# Altium PCB DSO.PcbDoc
Units mm, origin at the board's own origin, x right, y up, seen from the top; angles counter-clockwise.
Board outline 110 x 100 mm, 2 copper layers (Top Layer, Bottom Layer), stack 1.571 mm thick; 103 components, 108 nets, 477 pads, 0 vias.
Unrouted connection lines stored in the file: 262.
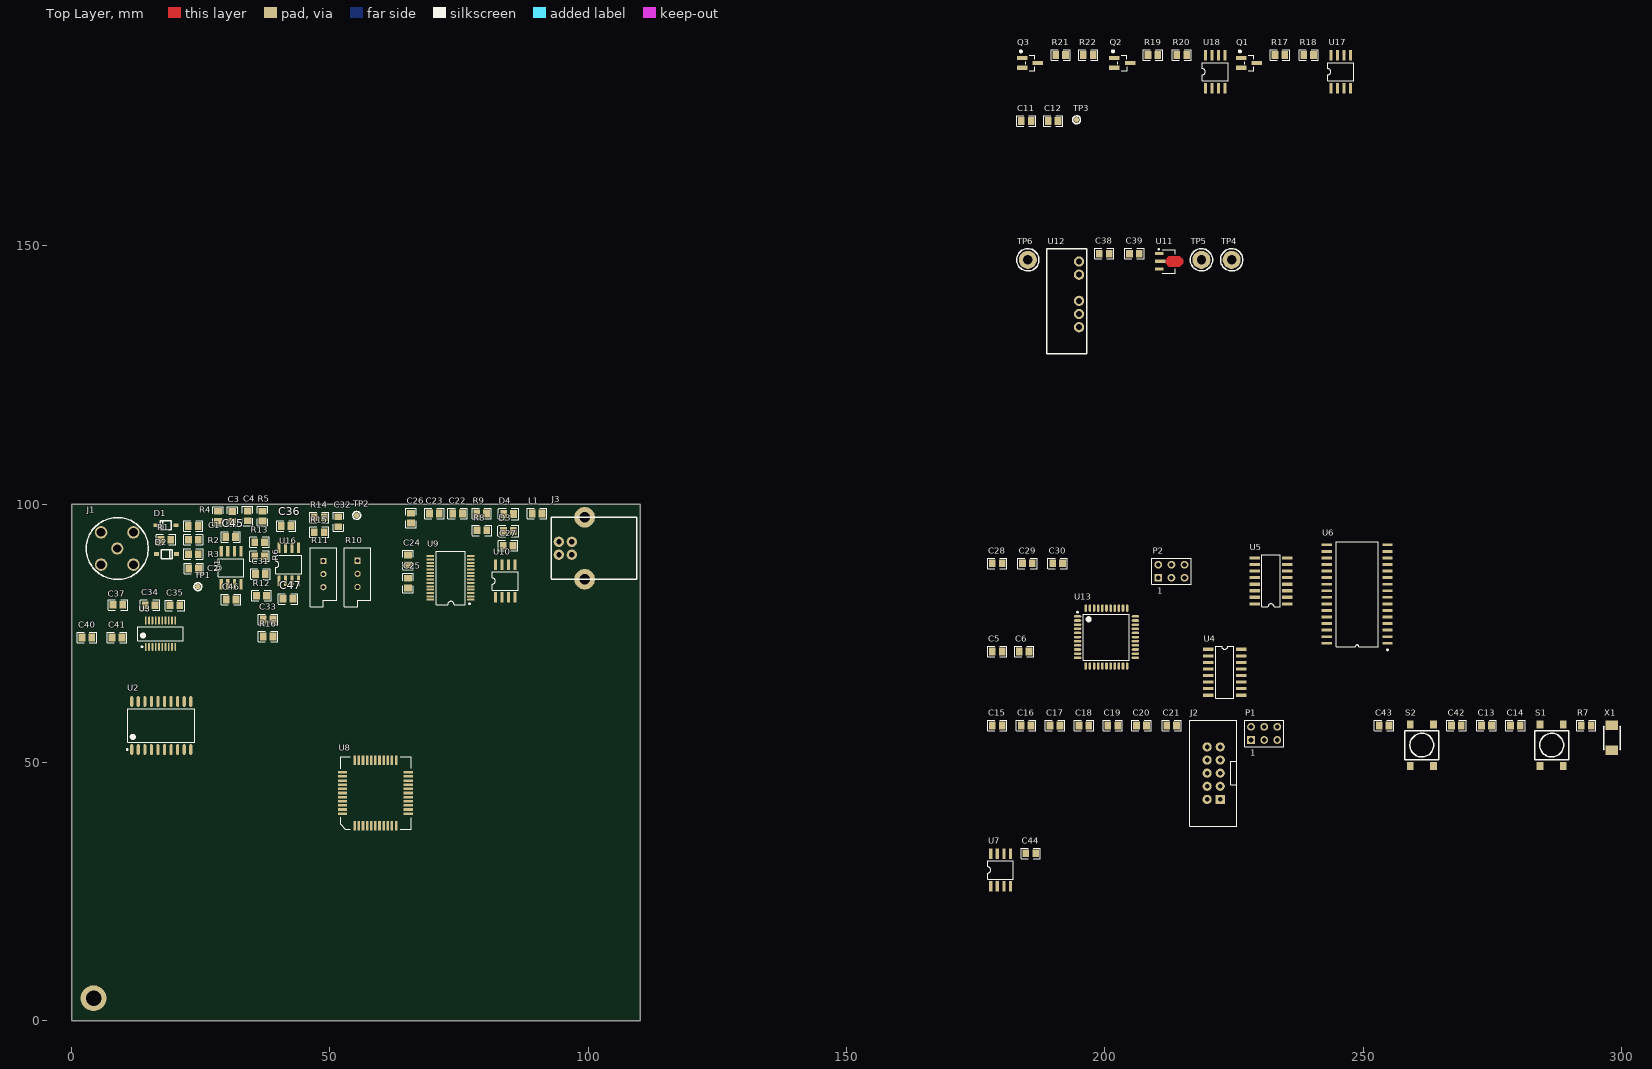
[diagram p0: Top Layer view]
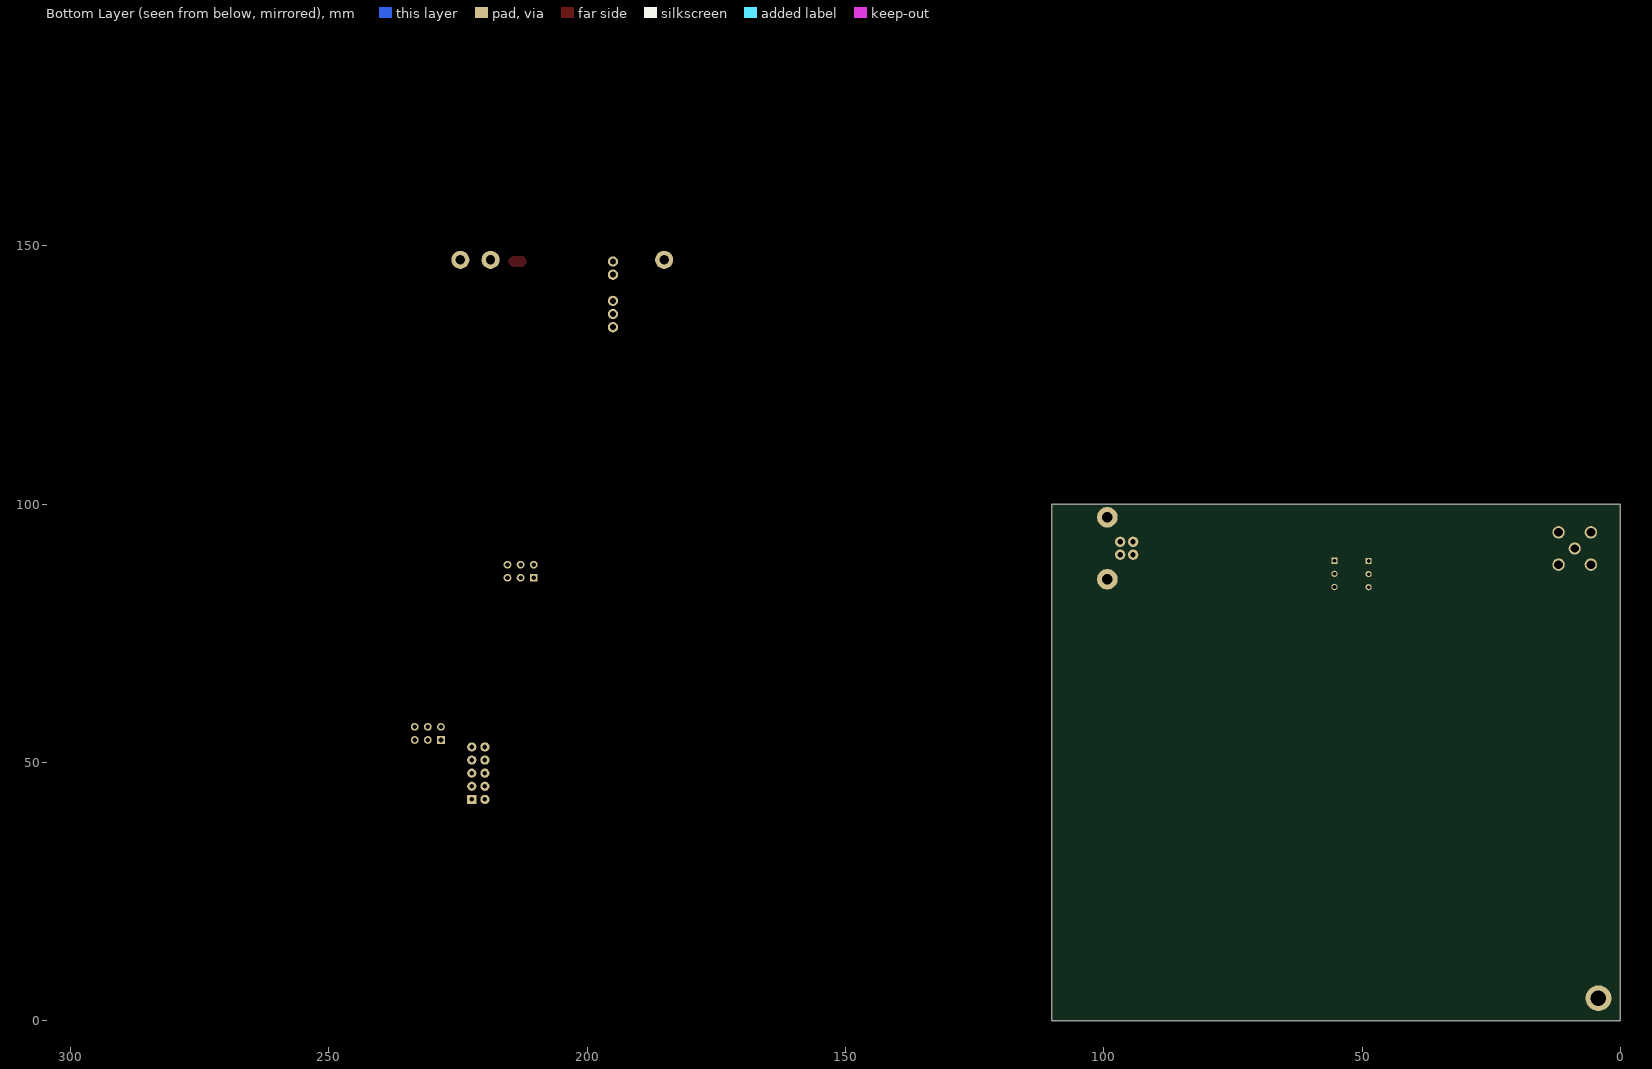
[diagram p1: Bottom Layer view, seen from below]

## Layer stack, top to bottom
Top Solder: solder mask 0.0102, Solder Resist, Dk 3.5
Top Layer: signal copper 0.0356
Dielectric1: core 1.5, FR-4, Dk 4.8
Bottom Layer: signal copper 0.0356
Bottom Solder: solder mask 0.0102, Solder Resist, Dk 3.5

## Board outline
0.072,0.021 0.072,100.021 110.072,100.021 110.072,0.021

## Design rules (kind name [scope] priority, off if disabled: settings)
Clearance [All] p1: gap=0.254
ComponentClearance [All] p1 off: gap=0.254 collisioncheckmode=3 verticalgap=0.254 showdistances=FALSE
DiffPairsRouting [All] p1: maxlimit=0.508 minlimit=0.254 mostfreqgap=0.254 toplayer_minwidth=0.381 toplayer_maxwidth=0.381 toplayer_prefwidth=0.381 bottomlayer_minwidth=0.381 bottomlayer_maxwidth=0.381 bottomlayer_prefwidth=0.381 maxuncoupledlength=12.7
FabricationTestPointUsage TestPointUsage [All] p1: valid=0 allowmultiple=FALSE
FabricationTestpoint Testpoint [All] p1: side=3 testpointundercomponent=TRUE minsize=1.016 maxsize=2.54 preferedsize=1.524 minholesize=0 maxholesize=1.016 preferedholesize=0.813 testpointgrid=0.025 allowsidetop=TRUE allowsidebottom=TRUE usegrid=TRUE gridtolerance=0
Height [All] p1: minheight=0 maxheight=200 prefheight=12.7
HoleSize [All] p1: absolutevalues=TRUE maxlimit=5.055 minlimit=0.381 maxpercent=80.000 minpercent=20.000
MinimumAnnularRing [All] p1: minimumring=0.127
PolygonConnect PolygonConnect_2 [(ObjectKind = 'Via') vs IsNamedPolygon('Bottom Layer-No Net') Or  IsNamedPolygon('Top Power') Or  IsNamedPolygon('TOP MCU VCC') Or  IsNamedPolygon('Top Analog') Or  IsNamedPolygon('Top USB') Or  IsNamedPolygon('Top Digital') Or  IsNamedPolygon('Top RAM VCC') Or  IsNamedPolygon('Bottom Power') Or  IsNamedPolygon('Bottom Analog') Or  IsNamedPolygon('Bottom Digital')] p1: connectstyle=Direct reliefconductorwidth=0.254 reliefentries=4 polygonreliefangle="90 Angle" airgapwidth=0.254
PolygonConnect PolygonConnect_1 [(ObjectKind = 'Via')] p2 off: connectstyle=Direct reliefconductorwidth=0.254 reliefentries=4 polygonreliefangle="90 Angle" airgapwidth=0.254
PolygonConnect [All] p3 off: connectstyle=Relief reliefconductorwidth=0.254 reliefentries=4 polygonreliefangle="90 Angle" airgapwidth=0.254
RoutingVias [All] p1: holewidth=0.381 width=0.635 viastyle="Through Hole" minholewidth=0.381 minwidth=0.635 maxholewidth=2.032 maxwidth=2.54
SilkToSolderMaskClearance SilkscreenOverComponentPads [IsPad] p1: minsilkscreentomaskgap=0.254 clearancetoexposedcopper=TRUE
SolderMaskExpansion [All] p1: expansion=0.152
Width [All] p1: maxlimit=25.4 minlimit=0.152 preferedwidth=0.254 minimp=50.000000 maximp=50.000000 favimp=50.000000
22 further rules are at their usual default settings.

## Classes and differential pairs
component class U_DSO_Trig: Q1 Q2 Q3 R17 R18 R19 R20 R21 R22 U17 U18
component class U_DSO_CPLD: C28 C29 C30 P2 U13
component class U_DSO_Clock: C44 U7
component class U_DSO_Control: C13 C14 C15 C16 C17 C18 C19 C20 C21 C42 C43 J2 P1 R7 S1 S2 U8 X1
component class U_DSO_Counters: C5 C6 U4 U5
component class U_DSO_Front: C1 C2 C45 C46 D1 D2 J1 R1 R2 R3 TP1 U1
component class U_DSO_IO: C22 C23 C24 C25 C26 C27 D3 D4 J3 L1 R8 R9 U9 U10
component class U_DSO_Power: C38 C39 TP4 TP5 TP6 U11 U12
component class U_DSO_RAM: C11 C12 TP3 U6
net class ADC_A[0..15]: ADC_A0 ADC_A1 ADC_A2 ADC_A3 ADC_A4 ADC_A5 ADC_A6 ADC_A7 ADC_A8 ADC_A9 ADC_A10 ADC_A11 ADC_A12 ADC_A13 ADC_A14 ADC_A15
net class ADC_D[0..7]: ADC_D0 ADC_D1 ADC_D2 ADC_D3 ADC_D4 ADC_D5 ADC_D6 ADC_D7
component class U_DSO_ADC: C3 C4 C31 C32 C33 C34 C35 C36 C37 C40 C41 C47 R4 R5 R6 R10 R11 R12 R13 R14 R15 R16 TP2 U2 U3 U16

## Components (designator, comment, footprint, x,y, rotation, side; value= is the part's Value field where it differs from the comment)
C1 "5pF" 0805C 23.561,95.783 r0 top
C2 "5pF" 0805C 23.647,87.554 r0 top
C3 "50pF" 0805C 31.14,97.638 r90 top
C4 "100pF" 0805C 34.112,97.739 r270 top
C5 "100nF" 0805C 179.193,71.497 r0 top
C6 "100nF" 0805C 184.4,71.497 r0 top
C11 "100nF" 0805C 184.806,174.164 r0 top
C12 "100nF" 0805C 190.013,174.164 r0 top
C13 "18pF" 0805C 273.884,57.146 r0 top
C14 "18pF" 0805C 279.472,57.146 r0 top
C15 "100nF" 0805C 179.193,57.146 r0 top
C16 "100nF" 0805C 184.781,57.146 r0 top
C17 "100nF" 0805C 190.369,57.146 r0 top
C18 "100nF" 0805C 195.957,57.146 r0 top
C19 "100nF" 0805C 201.545,57.146 r0 top
C20 "100nF" 0805C 207.107,57.146 r0 top
C21 "100nF" 0805C 212.949,57.146 r0 top
C22 "100nF" 0805C 74.752,98.196 r180 top
C23 "100nF" 0805C 70.231,98.196 r0 top
C24 "100nF" 0805C 65.126,89.205 r90 top
C25 "100nF" 0805C 65.126,84.709 r270 top
C26 "100nF" 0805C 65.735,97.307 r90 top
C27 "100nF" 0805C 84.506,91.948 r0 top
C28 "100nF" 0805C 179.193,88.54 r0 top
C29 "100nF" 0805C 185.035,88.54 r0 top
C30 "100nF" 0805C 190.877,88.54 r0 top
C31 "100nF" 0805C 36.551,86.462 r0 top
C32 "47pF" 0805C 51.638,96.596 r270 top
C33 "1pF" 0805C 38.049,77.673 r180 top
C34 "100nF" 0805C 15.215,80.442 r180 top
C35 "100nF" 0805C 20.015,80.416 r0 top
C36 "100nF" 0805C 41.554,95.758 r0 top
C37 "100nF" 0805C 8.992,80.518 r0 top
C38 "1uF" 0805C 199.894,148.484 r0 top
C39 "1uF" 0805C 205.736,148.484 r0 top
C40 "100nF" 0805C 2.968,74.164 r0 top
C41 "100nF" 0805C 8.81,74.164 r0 top
C42 "100nF" 0805C 268.042,57.146 r0 top
C43 "100nF" 0805C 254.072,57.146 r0 top
C44 "100nF" 0805C 185.67,32.406 r0 top
C45 "100nF" 0805C 30.81,93.624 r0 top
C46 "100nF" 0805C 30.886,81.534 r180 top
C47 "100nF" 0805C 41.91,81.686 r180 top
D1 "Diode" SOD-123 18.288,95.91 r0 top
D2 "Diode" SOD-123 18.39,90.322 r180 top
D3 "TX" 0805D-GREEN 84.582,94.793 r0 top
D4 "RX" 0805D-RED 84.607,98.095 r0 top
J1 "INPUT" BNC_VERT 8.865,91.415 r0 top
J2 "JTAG" BOXEDVERT10 222.347,42.846 r90 top
J3 "USB" USBPLUG 92.837,97.46 r270 top
L1 "300mA" 0805 90.119,98.196 r0 top
P1 "Header 3x2" HDR3x2 230.856,55.622 r0 top
P2 "Header 3x2" HDR3x2 212.899,87.016 r0 top
Q1 "BSS138" SOT23 227.935,185.416 r0 top
Q2 "BSS138" SOT23 203.374,185.416 r0 top
Q3 "BSS138" SOT23 185.543,185.416 r0 top
R1 "49" 0805 18.288,93.116 r180 top
R2 "510K" 0805 23.597,93.116 r180 top
R3 "510K" 0805 23.597,90.322 r180 top
R4 "100" 0805 28.346,97.65 r90 top
R5 "47" 0805 36.957,97.688 r270 top
R6 "100" 0805 36.398,89.916 r180 top
R7 "10k" 0805 293.188,57.146 r0 top
R8 "1k" 0805 79.451,94.945 r180 top
R9 "1k" 0805 79.4,98.196 r0 top
R10 "RPot" VR5 55.372,86.512 r270 top
R11 "RPot" VR5 48.768,86.462 r270 top
R12 "49" 0805 36.779,82.271 r0 top
R13 "499" 0805 36.398,92.634 r180 top
R14 "39" 0805 47.955,97.46 r180 top
R15 "220" 0805 47.955,94.564 r180 top
R16 "1k" 0805 38.049,74.397 r180 top
R17 "10K" 0805 233.879,186.914 r0 top
R18 "10K" 0805 239.467,186.914 r0 top
R19 "10K" 0805 209.317,186.914 r0 top
R20 "10K" 0805 214.905,186.914 r0 top
R21 "10K" 0805 191.461,186.914 r0 top
R22 "10K" 0805 196.795,186.914 r0 top
S1 "RESET" "SPST PB SWITCH SMD" 286.508,53.336 r90 top
S2 "TRIG" "SPST PB SWITCH SMD" 261.362,53.336 r90 top
TP1 "INPUT" Testpoin 24.46,84.023 r0 top
TP2 "INPUT" Testpoin 55.22,97.815 r90 top
TP3 "INPUT" Testpoin 194.534,174.392 r90 top
TP4 "-5" "PIN 1.8mm" 224.557,147.29 r0 top
TP5 "GND" "PIN 1.8mm" 218.715,147.29 r0 top
TP6 "+5" "PIN 1.8mm" 185.111,147.29 r0 top
U1 "LT1819" SOIC-8 30.886,87.681 r90 top
U2 "74HC541" SOT163-1_N 17.374,57.15 r90 top
U3 "ADS830E" TI-DBQ20_L 17.247,74.93 r90 top
U4 "74HC590" SOIC-16 223.211,67.458 r0 top
U5 "74HC590" SOIC-16 232.181,85.141 r180 top
U6 "CY7C1019D" TSOP-32 248.844,82.601 r180 top
U7 "PT7C4511" SOIC-8 179.828,29.18 r90 top
U8 "ATMEGA16" QFP-48 58.826,44.094 r90 top
U9 "FT232RL" SSOP-28 73.381,85.725 r180 top
U10 "Si8421" SOIC-8 83.947,85.115 r90 top
U11 "MCP1700T-3302E/MB" SOT89 212.467,146.986 r0 top
U12 "RD0505D" SIP_NMG 195.017,146.96 r0 top
U13 "XC9536XL-10VQ44C" VQ44_L 200.33,74.27 r0 top
U16 "LT1819" SOIC-8 42.062,88.341 r90 top
U17 "MAX9032" SOIC-8 245.69,183.689 r90 top
U18 "MCP4901" SOIC-8 221.382,183.689 r90 top
X1 "10Mhz" XTAL_FLAT_SMD 298.166,54.784 r90 top

## Footprints (in the part's own frame and the unit in brackets; to place one, negate y for a bottom-side part, rotate by r counter-clockwise, add the part's x,y. Pads: shape width x height; smd on the part's side, far side on the other; paste and mask are expansions set on the pad)
0805 [mm] "0805 Footprint"
  rect 1.3x1.5 smd: 1(-0.95,0) 2(0.95,0)
  silkscreen extent -1.87,-1.02 1.88,1.02, body extent -1,-0.63 1,0.62, height 0.5
0805C [mm] "0805 Footprint"
  rect 1.3x1.5 smd: 1(-0.95,0) 2(0.95,0)
  silkscreen extent -1.87,-1.02 1.88,1.02, body extent -1,-0.62 1,0.63, height 0.78
0805D-GREEN [mm] "0805 Diode"
  rect 1.3x1.5 smd: A(0.95,0) K(-0.95,0)
  silkscreen extent -2.03,-1.14 1.95,1.12, body extent -1.01,-0.62 1.01,0.63, height 1.1
0805D-RED [mm] "0805 Diode RED"
  rect 1.3x1.5 smd: A(0.95,0) K(-0.95,0)
  silkscreen extent -2.03,-1.14 1.95,1.12, body extent -1.05,-0.67 1.05,0.68, height 0.9
BNC_VERT [mil] "BNC vertical connector"
  round 92 hole 62: 1(0,0)
  round 95 hole 67: 2(-123.23,-123.23) 3(123.23,-123.23) 4(123.23,123.23) 5(-123.23,123.23)
  silkscreen extent -236,-236 236,236, body extent -217,-217 217,217, height 539
BOXEDVERT10 [mil] "IDC Header 2.54mm Boxed 10 pins"
  rect 70x70 hole 35.43: 1(0,0)
  round 70 hole 35.43: 2(0,100) 3(100,0) 4(100,100) 5(200,0) 6(200,100) 7(300,0) 8(300,100) 9(400,0) 10(400,100)
  silkscreen extent -203,-127 603,232, body extent -204,-129 604,237, height 359
HDR3x2 [mm] "Connector; Header; 8x2 Position"
  rect 1.5x1.5 hole 0.9: 1(-2.54,-1.27)
  round 1.5 hole 0.9: 2(-2.54,1.27) 3(0,-1.27) 4(0,1.27) 5(2.54,-1.27) 6(2.54,1.27)
  silkscreen extent -3.81,-2.54 3.81,2.54, body extent -3.81,-2.54 3.81,2.54, height 9.5
"PIN 1.8mm" [mm] "Single Pin"
  round 3.5 hole 1.8: 1(0,0)
  silkscreen extent -2.16,-2.16 2.16,2.16
QFP-48 [mm]
  rect 1.8x0.5 smd: 1(-6.35,4) 2(-6.35,3.2) 3(-6.35,2.4) 4(-6.35,1.6) 5(-6.35,0.8) 6(-6.35,0) 7(-6.35,-0.8) 8(-6.35,-1.6) 9(-6.35,-2.4) 10(-6.35,-3.2) 11(-6.35,-4) 23(6.35,-4) 24(6.35,-3.2) 25(6.35,-2.4) 26(6.35,-1.6) 27(6.35,-0.8) 28(6.35,0) 29(6.35,0.8) 30(6.35,1.6) 31(6.35,2.4) 32(6.35,3.2) 33(6.35,4)
  rect 0.5x1.8 smd: 12(-4,-6.35) 13(-3.2,-6.35) 14(-2.4,-6.35) 15(-1.6,-6.35) 16(-0.8,-6.35) 17(0,-6.35) 18(0.8,-6.35) 19(1.6,-6.35) 20(2.4,-6.35) 21(3.2,-6.35) 22(4,-6.35) 34(4,6.35) 35(3.2,6.35) 36(2.4,6.35) 37(1.6,6.35) 38(0.8,6.35) 39(0,6.35) 40(-0.8,6.35) 41(-1.6,6.35) 42(-2.4,6.35) 43(-3.2,6.35) 44(-4,6.35)
  silkscreen extent -6.98,-6.98 6.98,6.73, body extent -5.97,-6 6.03,6, height 1.13
SIP_NMG [mm] "SIP for NMG DC to DC"
  round 2 hole 1.2: 1(0,0) 2(0,-2.54) 3(0,-7.62) 4(0,-10.16) 5(0,-12.7)
  silkscreen extent -6.2,-17.82 1.5,2.5, body extent -6.2,-17.8 1.5,2.5, height 10.2
SOD-123 [mm] "SMD diode"
  rect 1x0.75 smd: A(1.925,0) K(-1.925,0)
  silkscreen extent -1.12,-0.85 1.05,0.85, body extent -1.93,-0.86 1.92,0.84, height 1.42
SOIC-8 [mil] "SOIC-8 Footprint"
  rect 80x24 smd: 1(-125,75) 2(-125,25) 3(-125,-25) 4(-125,-75) 5(125,-75) 6(125,-25) 7(125,25) 8(125,75)
  silkscreen extent -70,-98 70,98, body extent -118,-98 118,98, height 69
SOIC-16 [mil] "SOIC-16 Footprint"
  rect 80x24 smd: 1(-125,175) 2(-125,125) 3(-125,75) 4(-125,25) 5(-125,-25) 6(-125,-75) 7(-125,-125) 8(-125,-175) 9(125,-175) 10(125,-125) 11(125,-75) 12(125,-25) 13(125,25) 14(125,75) 15(125,125) 16(125,175)
  silkscreen extent -70,-198 70,198, body extent -118,-197 118,197, height 69
SOT23 [mm] "SOT23, 3-Leads, Body 3.0x2.5mm (max), Pitch 0.95mm, IPC Low Density"
  rect 2.038x0.8 smd: 1(-1.524,0.95)
  rect 2.032x0.8 smd: 2(-1.524,-0.95) 3(1.524,0)
  silkscreen extent -1.9,-1.5 0.94,2.36, body extent -1.32,-1.5 1.32,1.5, height 1.08
SOT89 [mm] "SOT89, 3-Leads, Body 4.50x2.50mm, Pitch 1.50mm, Lead Span 4.1mm, IPC Low Density"
  rect 1.6x0.6 smd: 1(-1.9,1.5) 3(-1.9,-1.5)
  rect 2x0.7 smd: 2(-1.7,0)
  Top Layer region: -0.7,0.35 -0.05,1 2.05,1 2.7,0.35 2.7,-0.35 2.05,-1 -0.05,-1 -0.7,-0.35
  silkscreen extent -2.15,-2.3 1.22,2.47, body extent -2.2,-2.3 1.85,2.3, height 1.6
SOT163-1_N [mm] "SOIC, 20-Leads, Body 12.7x7.5mm, Pitch 1.27mm, IPC Medium Density"
  oval 2.1x0.6 smd: 1(-4.65,5.715) 2(-4.65,4.445) 3(-4.65,3.175) 4(-4.65,1.905) 5(-4.65,0.635) 6(-4.65,-0.635) 7(-4.65,-1.905) 8(-4.65,-3.175) 9(-4.65,-4.445) 10(-4.65,-5.715) 11(4.65,-5.715) 12(4.65,-4.445) 13(4.65,-3.175) 14(4.65,-1.905) 15(4.65,-0.635) 16(4.65,0.635) 17(4.65,1.905) 18(4.65,3.175) 19(4.65,4.445) 20(4.65,5.715)
  silkscreen extent -4.77,-6.5 3.2,6.69, body extent -5.15,-6.5 5.15,6.5, height 2.65
"SPST PB SWITCH SMD" [mm] "Push Button Switch Surface Mount"
  rect 1.55x1.3 smd: 1(-3.975,2.25) 1(3.975,2.25) 2(-3.975,-2.25) 2(3.975,-2.25)
  silkscreen extent -2.83,-3.3 2.76,3.3, body extent -4.5,-3 4.5,3, height 5
SSOP-28 [mm] "Line Driver"
  oval 1.45x0.38 smd: 1(-3.9,4.225)
  rect 1.45x0.38 smd: 2(-3.9,3.575) 3(-3.9,2.925) 4(-3.9,2.275) 5(-3.9,1.625) 6(-3.9,0.975) 7(-3.9,0.325) 8(-3.9,-0.325) 9(-3.9,-0.975) 10(-3.9,-1.625) 11(-3.9,-2.275) 12(-3.9,-2.925) 13(-3.9,-3.575) 14(-3.9,-4.225) 15(3.9,-4.225) 16(3.9,-3.575) 17(3.9,-2.925) 18(3.9,-2.275) 19(3.9,-1.625) 20(3.9,-0.975) 21(3.9,-0.325) 22(3.9,0.325) 23(3.9,0.975) 24(3.9,1.625) 25(3.9,2.275) 26(3.9,2.925) 27(3.9,3.575) 28(3.9,4.225)
  silkscreen extent -3.8,-5.18 2.79,5.18, body extent -3.9,-5.1 3.9,5.1, height 2
Testpoin [mil] "Testpoint"
  round 40 smd: 1(0,0)
  silkscreen extent -30,-30 30,30
TI-DBQ20_L [mm] "SOP, 20-Leads, Body 8.65x3.9mm, Pitch 0.635mm, IPC High Density"
  oval 1.55x0.35 smd: 1(-2.55,2.857) 2(-2.55,2.222) 3(-2.55,1.587) 4(-2.55,0.952) 5(-2.55,0.317) 6(-2.55,-0.318) 7(-2.55,-0.953) 8(-2.55,-1.588) 9(-2.55,-2.222) 10(-2.55,-2.857) 11(2.55,-2.857) 12(2.55,-2.222) 13(2.55,-1.587) 14(2.55,-0.952) 15(2.55,-0.317) 16(2.55,0.318) 17(2.55,0.953) 18(2.55,1.588) 19(2.55,2.222) 20(2.55,2.857)
  silkscreen extent -2.67,-4.4 1.38,4.4, body extent -3,-4.4 3,4.4, height 1.75
TSOP-32 [mm]
  rect 2x0.55 smd: 1(-5.88,9.525) 2(-5.88,8.255) 3(-5.88,6.985) 4(-5.88,5.715) 5(-5.88,4.445) 6(-5.88,3.175) 7(-5.88,1.905) 8(-5.88,0.635) 9(-5.88,-0.635) 10(-5.88,-1.905) 11(-5.88,-3.175) 12(-5.88,-4.445) 13(-5.88,-5.715) 14(-5.88,-6.985) 15(-5.88,-8.255) 16(-5.88,-9.525) 17(5.88,-9.525) 18(5.88,-8.255) 19(5.88,-6.985) 20(5.88,-5.715) 21(5.88,-4.445) 22(5.88,-3.175) 23(5.88,-1.905) 24(5.88,-0.635) 25(5.88,0.635) 26(5.88,1.905) 27(5.88,3.175) 28(5.88,4.445) 29(5.88,5.715) 30(5.88,6.985) 31(5.88,8.255) 32(5.88,9.525)
  silkscreen extent -6.03,-10.16 4.05,10.94, body extent -5.88,-10.55 5.88,10.55, height 1.2
USBPLUG [mm]
  round 2 hole 1: 1(4.75,1.5) 2(7.25,1.5) 3(7.25,4) 4(4.75,4)
  round 4 hole 2: ""(0,6.5) ""(12,6.5)
  silkscreen extent 0,0 12,16.6, body extent -1.52,0.29 13.45,16.79, height 11.06
VQ44_L [mm] "Thin QFP, 44-Leads, Body 10x10mm, Pitch 0.8mm, IPC High Density"
  oval 1.45x0.5 smd: 1(-5.6,4) 2(-5.6,3.2) 3(-5.6,2.4) 4(-5.6,1.6) 5(-5.6,0.8) 6(-5.6,0) 7(-5.6,-0.8) 8(-5.6,-1.6) 9(-5.6,-2.4) 10(-5.6,-3.2) 11(-5.6,-4) 23(5.6,-4) 24(5.6,-3.2) 25(5.6,-2.4) 26(5.6,-1.6) 27(5.6,-0.8) 28(5.6,0) 29(5.6,0.8) 30(5.6,1.6) 31(5.6,2.4) 32(5.6,3.2) 33(5.6,4)
  oval 0.5x1.45 smd: 12(-4,-5.6) 13(-3.2,-5.6) 14(-2.4,-5.6) 15(-1.6,-5.6) 16(-0.8,-5.6) 17(0,-5.6) 18(0.8,-5.6) 19(1.6,-5.6) 20(2.4,-5.6) 21(3.2,-5.6) 22(4,-5.6) 34(4,5.6) 35(3.2,5.6) 36(2.4,5.6) 37(1.6,5.6) 38(0.8,5.6) 39(0,5.6) 40(-0.8,5.6) 41(-1.6,5.6) 42(-2.4,5.6) 43(-3.2,5.6) 44(-4,5.6)
  silkscreen extent -5.72,-4.45 4.45,4.95, body extent -5.97,-6 6.03,6, height 1.13
VR5 [mm] "Thru-Hole; 3 Leads"
  rect 1.2x1.2 hole 0.7: 1(-2.54,0)
  round 1.2 hole 0.7: 2(0,0) 3(2.54,0)
  silkscreen extent -5.08,-2.54 6.35,2.54
XTAL_FLAT_SMD [mm]
  rect 1.8x2.4 smd: 1(-2.412,0) 2(2.412,0)
  silkscreen extent -2.33,-1.59 2.21,1.6, body extent -2.58,-1.68 2.58,1.68, height 1.35

## Part data
C1 C2 C3 C4 C5 C6 C11 C12 C13 C14 C15 C16 C17 C18 C19 C20 C21 C22 C23 C24 C25 C26 C27 C28 C29 C30 C31 C32 C33 C34 C35 C36 C37 C38 C39 C40 C41 C42 C43 C45 C46 C47: library part C, "Capacitor"
C44: library part c, "Capacitor"
D1 D2: library part D
D3: library part "LED GREEN", "Light Emitting Diode"
D4: library part "LED RED", "Light Emitting Diode"
J1: library part BNC, "BNC Straight"
J2: library part JTAG_CON, "JTAG_CON"
J3: library part USBPLUG, "USB B Type Connector"
L1: library part I, "Inductor"
P1 P2: "Header, 5-Pin"
Q1 Q2 Q3: library part MOSFET-N, "N-Channel MOSFET"
R1 R2 R3 R4 R5 R6 R7 R8 R9 R12 R13 R14 R15 R16 R17 R18 R19 R20 R21 R22: library part R, "Resistor"
R10 R11: "Potentiometer"
S1 S2: library part SW_PB_1P1T4, "Momentary Push Button Switch 1P 1T 2pins"
TP1 TP2 TP3: library part "Test Point", "Pad"
TP4 TP5 TP6: library part WIRE, "Pad"
U1 U16: "OpAmp High Frequency Dual"
U2: "(ADV) Octal Buffer, Line Driver"
U3: "8-Bit, 60 MSPS ADC Single-Ended / Differential Input, Internal / External Reference and Programmble Input Range, -40 to 85 degC, 20-pin SOP (DBQ20), Green (RoHS & no Sb/Br)"
U4 U5: "8-Bit Binary Counter Register"
U6: "SRAM 128k x 8"
U7: "PLL Clock Multiplier"
U8: "ATMEGA16 Microcontroller"
U9: "USB to Serial bridge"
U10: "Dual Channel Digital Isolator Both Ways"
U11: library part MCP1700T, "Low Quiescent Current LDO, 3-Pin SOT-89, Extended Temperature, Tape and Reel"
U12: "(ADV) DC to DC converter 5V in +-5V out"
U13: library part XC9536XL-10VQG44C, "FastFLASH XC900XL, 3.3V High-Performance 36 Macrocell CPLD, 34 User I/Os, 44-Pin VQFP, Speed Grade 10, Commercial Grade"
U17: "Dual Comparator"
U18: "DAC 8bit SPI"
X1: library part XTAL, "Crystal Oscillator"

## Free pads (board coordinates)
  round 5 hole 3: ""(4.267,4.369)

## Nets (pads, with @x,y where several pads share a name; then routed paths per layer and width w, separated by ;. In a path a pad name is that pad's centre, name@x,y a point inside that pad or via, vN(x,y) a via of type N, cw(c..) or ccw(c..) an arc to the next point about the centre after c; other vN are vias at no path point)
3V3: C23.1 U9.17
3V_REF: C31.1 R12.1 U3.13
ADC_A0: U4.15 U6.16
ADC_A1: U4.1 U6.15
ADC_A2: U4.2 U6.14
ADC_A3: U4.3 U6.13
ADC_A4: U4.4 U6.4
ADC_A5: U4.5 U6.3
ADC_A6: U4.6 U6.2
ADC_A7: U4.7 U6.1
ADC_A8: U5.15 U6.31
ADC_A9: U5.1 U6.30
ADC_A10: U5.2 U6.29
ADC_A11: U5.3 U6.21
ADC_A12: U5.4 U6.20
ADC_A13: U5.5 U6.19
ADC_A14: U5.6 U6.18
ADC_A15: U5.7 U6.17
ADC_CLK: TP3.1 U3.10 U6.12 U13.41
ADC_D0: U2.18 U6.6 U8.37
ADC_D1: U2.17 U6.7 U8.36
ADC_D2: U2.16 U6.10 U8.35
ADC_D3: U2.15 U6.11 U8.34
ADC_D4: U2.14 U6.22 U8.33
ADC_D5: U2.13 U6.23 U8.32
ADC_D6: U2.12 U6.26 U8.31
ADC_D7: U2.11 U6.27 U8.30
AGND: C2.2 C4.2 C31.2 C32.2 C34.2 C35.2 C36.2 C38.2 C40.2 C45.2 C46.2 C47.2 J1.2 J1.3 J1.4 J1.5 R3.1 R15.1 TP5.1 U1.5 U3.1 U3.12 U3.18 U11.1 U17.4 U18.5 U18.7
CH1_NORM: C32.1 R14.1 TP2.1 U3.17 U17.2
CLEAR_COUNT: U4.10 U5.10 U13.31
COUNTER_CLK: U4.11 U4.13 U5.13 U13.29
CPLD_TCK: P2.6 U13.11
CPLD_TD0: P2.4 U13.24
CPLD_TDI: P2.2 U13.9
CPLD_TMS: P2.5 U13.10
DGND: C11.2 C12.2 C13.2 C14.2 C15.2 C16.2 C17.2 C18.2 C19.2 C20.2 C21.2 C27.2 C28.2 C29.2 C30.2 C37.1 C39.2 C41.2 C42.2 C43.2 C44.2 J2.2 J2.10 P2.1 S1.2 S2.2 U2.10 U2.19 U4.8 U4.14 U5.8 U5.14 U6.5 U6.9 U6.25 U7.3 U8.6 U8.18 U8.28 U8.39 U10.5 U13.4 U13.8 U13.13 U13.14 U13.16 U13.17 U13.18 U13.19 U13.20 U13.21 U13.22 U13.23 U13.25 U13.27 U13.32 U13.33 U13.34 U13.36 U13.37 U13.38 U13.39 U13.40 U13.42
DVCC: C11.1 C12.1 C15.1 C16.1 C17.1 C18.1 C19.1 C20.1 C21.1 C27.1 C28.1 C29.1 C30.1 C37.2 C39.1 C41.1 C44.1 J2.4 J2.7 P1.2 P2.3 Q1.1 Q2.1 Q3.1 R7.2 R17.2 R19.2 R21.2 U2.20 U3.20 U4.16 U5.16 U6.8 U6.24 U6.32 U7.2 U7.7 U8.5 U8.17 U8.27 U8.29 U8.38 U10.8 U11.3 U13.15 U13.26 U13.35
EDGE_SW: U8.41 U13.5
ENABLE: U8.42 U13.1
ENABLE_COUNT: U4.12 U5.12 U13.30
FAST_CLK: U7.5 U13.44
FILL_COMP: U8.11 U13.28
FORCE: U8.25 U13.2
FULL: U5.9 U13.7
GND: C5.2 C6.2 P1.6
LP_OUT: C3.1 R4.1 R13.2 U1.7
NetC1_1: C1.1 D1.A D2.K R1.1 R2.2
NetC1_2: C1.2 C2.1 R2.1 R3.2 U1.3
NetC3_2: C3.2 R5.2 U1.6
NetC4_1: C4.1 R4.2 R5.1 R6.1
NetC22_1: C22.1 J3.1 L1.2
NetC33_1: C33.1 R16.1 U16.2
NetC33_2: C33.2 R11.2 R16.2 U16.1
NetC34_1: C34.1 U3.15 U3.16
NetC35_1: C35.1 U3.14
NetD3_K: D3.K R8.2
NetD4_K: D4.K R9.2
NetJ1_1: J1.1 R1.2
NetQ1_3: Q1.3 R18.1 U18.2
NetQ2_3: Q2.3 R20.1 U18.3
NetQ3_3: Q3.3 R22.1 U18.4
NetR6_2: R6.2 TP1.1 U1.1 U1.2
NetR10_1: R10.1 R14.2 U16.7
NetR10_2: R10.2 R13.1 U16.6
NetR11_1: R11.1 R15.2 U16.5
NetR12_2: R12.2 U16.3
NetU2_2: U2.2 U3.2
NetU2_3: U2.3 U3.3
NetU2_4: U2.4 U3.4
NetU2_5: U2.5 U3.5
NetU2_6: U2.6 U3.6
NetU2_7: U2.7 U3.7
NetU2_8: U2.8 U3.8
NetU2_9: U2.9 U3.9
NetU7_1: U7.1 U8.13
NetU7_4: U7.4 U8.15
NetU7_6: U7.6 U8.14
NetU13_12: U13.12 U17.1
NetU17_3: U17.3 U18.8
OVERFLOW: U4.9 U5.11
R\A\M\_\R\E\A\D\: U6.28 U13.6
RAM_READ: U2.1 U8.44 U13.3
RST: C42.1 P1.5 R7.1 S1.1 U8.4
RX: U8.9 U10.7
RX_ISO: U9.1 U10.2
RXLED: R9.1 U9.22
SCK: P1.3 Q2.2 R19.1 U8.3
SDA: P1.4 Q3.2 R21.1 U8.1
SLA: P1.1 U8.2
SLOW_CLK: U8.40 U13.43
T_CS: Q1.2 R17.1 U8.26
TCK: J2.1 U8.21
TDI: J2.9 U8.24
TDO: J2.3 U8.23
TMS: J2.5 U8.22
TRIG: C43.1 S2.1 U8.43
TX: U8.10 U10.6
TX_ISO: U9.5 U10.3
TXLED: R8.1 U9.23
USBD+: J3.3 U9.15
USBD-: J3.2 U9.16
USBGND: C22.2 C23.2 C24.2 C25.2 C26.2 J3.4 U9.7 U9.18 U9.21 U9.25 U9.26 U10.4 U12.2
USBVCC: C24.1 C25.1 C26.1 D3.A D4.A L1.1 U9.4 U9.20 U10.1 U12.1
VCC: C5.1 C6.1
VCC+: C36.1 C38.1 C40.1 C45.1 D1.K R18.2 R20.2 R22.2 TP6.1 U1.8 U3.11 U3.19 U11.2 U12.5 U16.8 U17.8 U18.1 U18.6
VCC-: C46.1 C47.1 D2.A TP4.1 U1.4 U12.3 U16.4
XTAL1: C14.1 U8.8 X1.2
XTAL2: C13.1 U8.7 X1.1
pads on no net: J2.6 J2.8 J3. R10.3 R11.3 U7.8 U8.12 U8.16 U8.19 U8.20 U9.2 U9.3 U9.6 U9.8 U9.9 U9.10 U9.11 U9.12 U9.13 U9.14 U9.19 U9.24 U9.27 U9.28 U12.4 U17.5 U17.6 U17.7

## Silkscreen, mask and mechanical layers (free items; w line width, h text height)
Mechanical 1:
  lines w0.254: 0.072,0.021 0.072,100.021 110.072,100.021 110.072,0.021 0.072,0.021 ; 0.123,0.047 0.123,100.047 110.123,100.047 110.123,0.047 0.123,0.047

## Text inside footprints (layer, text, board x,y; h text height)
P1: Top Overlay "1" at 228.113,51.304 h1.2
P2: Top Overlay "1" at 210.155,82.698 h1.2